# Altium PCB PCB_PL.PcbDoc
Units mm, origin at the board's own origin, x right, y up, seen from the top; angles counter-clockwise.
Board outline 66.68 x 55.88 mm, 2 copper layers (Top Layer, Bottom Layer); 33 components, 14 nets, 82 pads, 0 vias.
Unrouted connection lines stored in the file: 1.
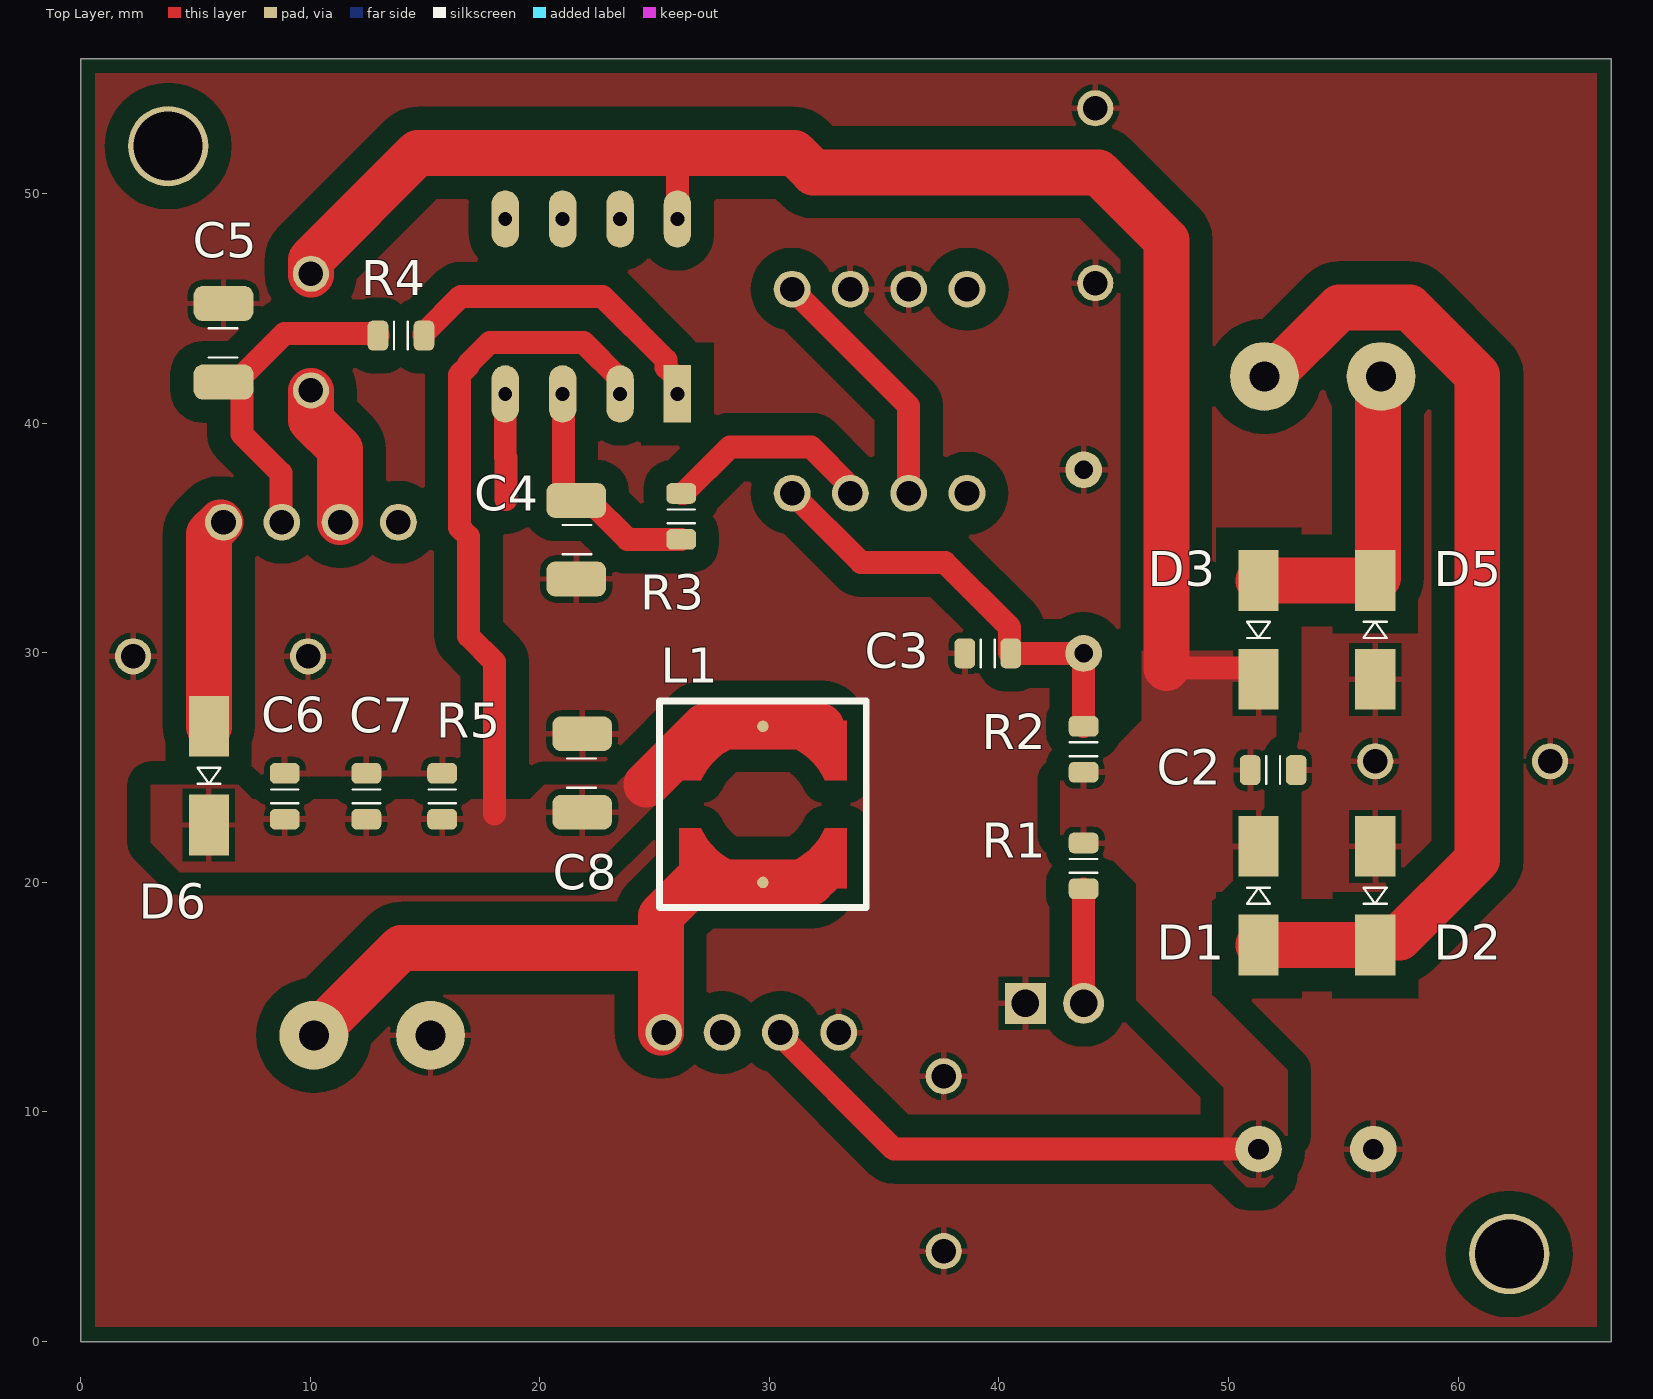
[diagram p0: Top Layer view]
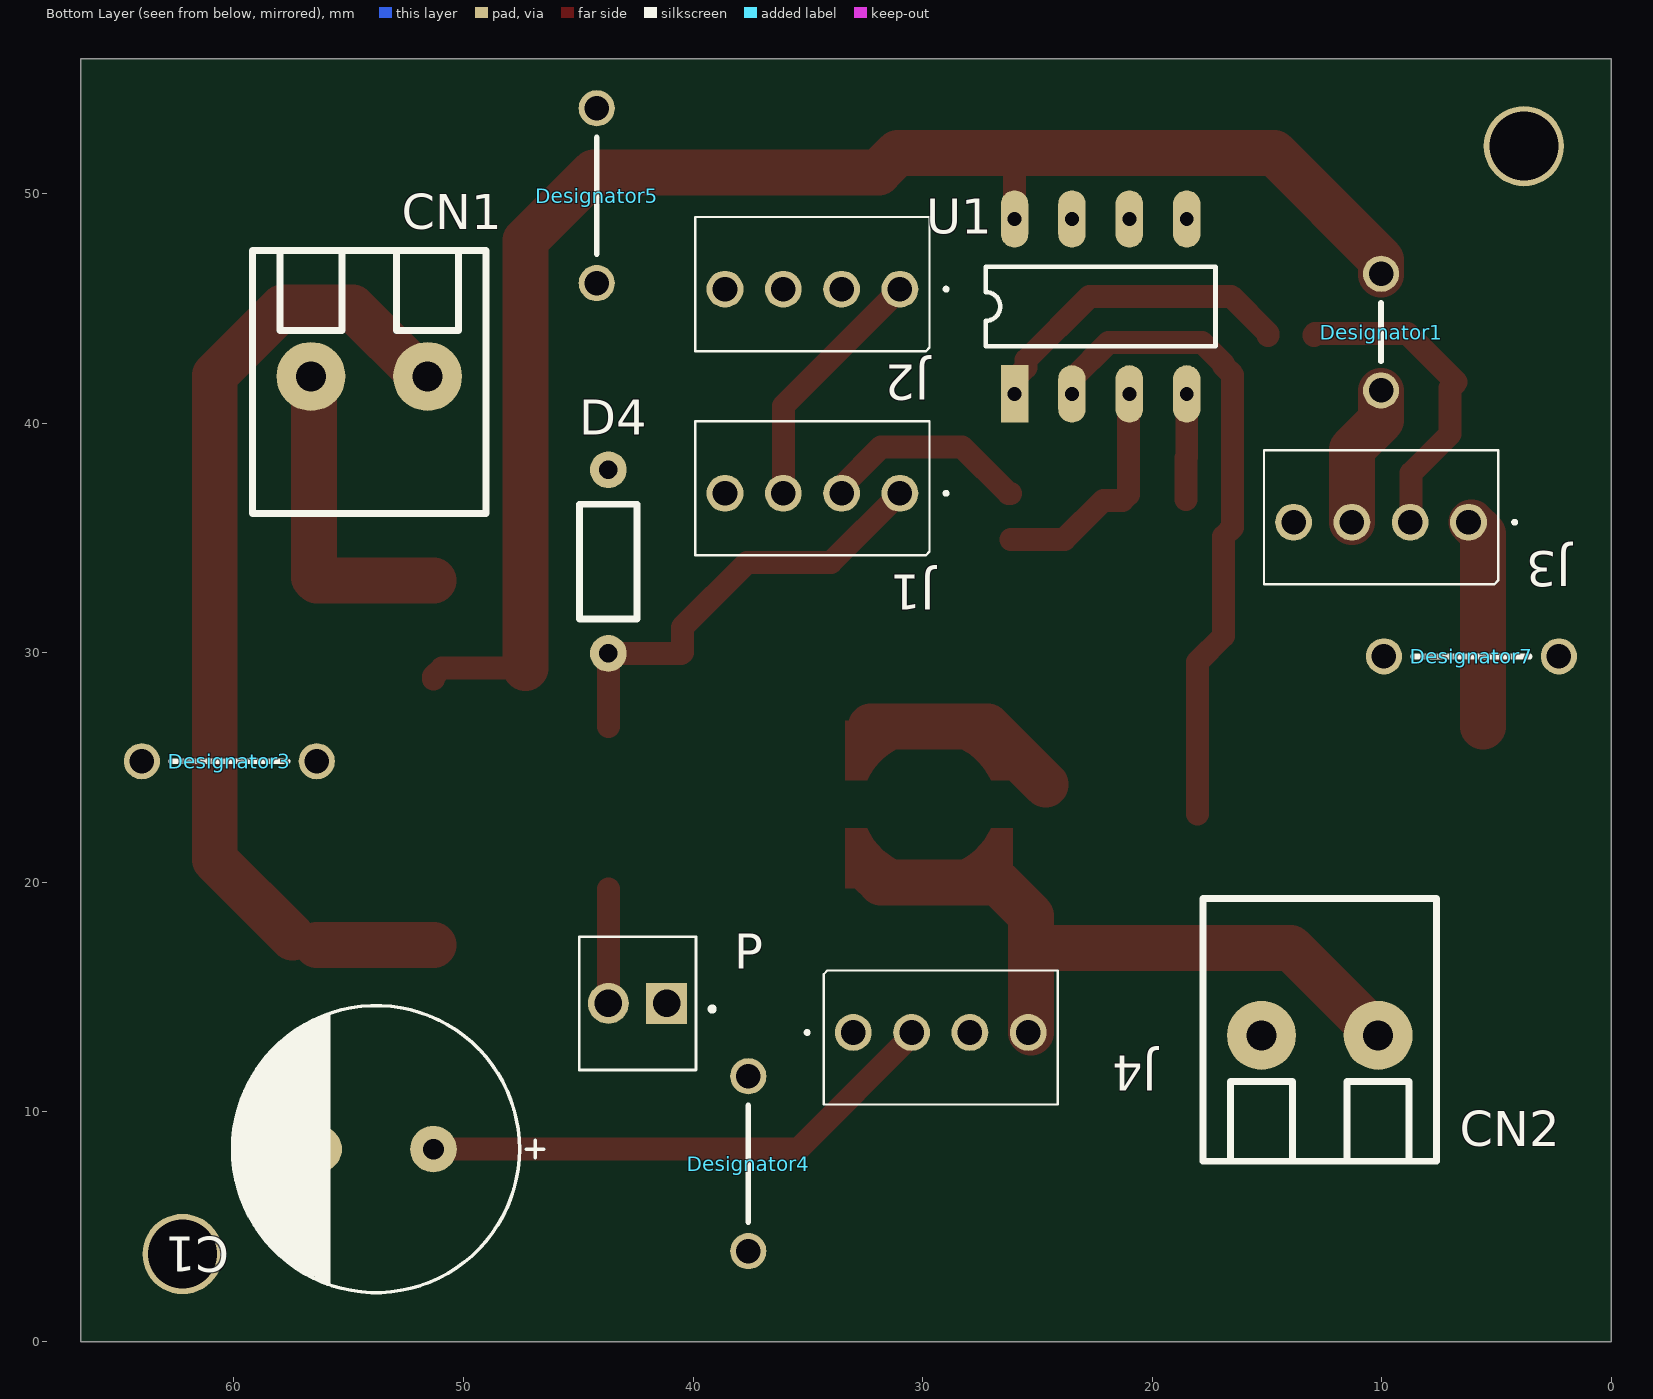
[diagram p1: Bottom Layer view, seen from below]

## Layer stack, top to bottom
Top Solder: solder mask 0.0102, Solder Resist, Dk 3.5
Top Layer: signal copper 0.0356
Dielectric 1: dielectric 0.32, FR-4, Dk 4.8
Bottom Layer: signal copper 0.0356
Bottom Solder: solder mask 0.0102, Solder Resist, Dk 3.5

## Board outline
0,0 0,55.88 66.675,55.88 66.675,0

## Design rules (kind name [scope] priority, off if disabled: settings)
Clearance [All] p1: gap=1 ignorepadtopadclearanceinfootprint=FALSE except(0: Arc-Hole Track-Hole SMDPad-Hole THPad-Hole Via-Hole Fill-Hole Poly-Hole Region-Hole Text-Hole; 0.5: Arc-THPad Track-THPad SMDPad-THPad THPad-THPad)
PolygonConnect [All] p1: connectstyle=Relief reliefconductorwidth=0.254 reliefentries=4 polygonreliefangle="90 Angle" airgapwidth=0.254
RoutingVias [All] p1: holewidth=0.711 width=1.27 viastyle="Through Hole" minholewidth=0.711 minwidth=1.27 maxholewidth=0.711 maxwidth=1.27
SolderMaskExpansion [All] p1: expansion=0.102
Width [All] p1: maxlimit=2 minlimit=1 preferedwidth=1 minimp=50.000000 maximp=50.000000 favimp=50.000000
30 further rules are at their usual default settings.

## Classes and differential pairs
component class SCH: C1 C2 C3 C4 C5 C6 C7 C8 CN1 CN2 D1 D2 D3 D4 D5 D6 J1 J2 J3 J4 L1 P R1 R2 R3 R4 R5

## Components (designator, comment, footprint, x,y, rotation, side; value= is the part's Value field where it differs from the comment)
C1 "Cap Pol" CAP-POL-D12.5-P5.0 53.808,8.382 r180 bottom value="1000 uF"
C2 "Cap" SMD0805 51.943,24.892 r0 top value=100nF
C3 "Cap" SMD0805 39.513,29.972 r180 top value=100nF
C4 "Cap" SMD1210 21.59,34.925 r90 top value=10nF
C5 "Cap" SMD1210 6.223,43.502 r270 top value=10nF
C6 "Cap" SMD0805 8.89,23.749 r90 top value=10uF
C7 "Cap" SMD0805 12.446,23.749 r90 top value=100nF
C8 "Cap" SMD1210 21.844,24.765 r270 top value=10nF
CN1 "Trafo" "BORNE 2Vias" 56.642,42.037 r180 bottom value=AKZ700-2
CN2 "OUTPUT" "BORNE 2Vias" 10.16,13.335 r0 bottom value=AKZ700-2
D1 "Diodo M7" DIODE_DO-214AC 51.308,19.422 r270 top value=M7
D2 "Diodo M7" DIODE_DO-214AC 56.388,19.422 r90 top value=M7
D3 "Diodo M7" DIODE_DO-214AC 51.308,30.997 r90 top value=M7
D4 "24 V" "Resistor 1/4W" 43.688,37.972 r270 bottom
D5 "Diodo M7" DIODE_DO-214AC 56.388,30.997 r270 top value=M7
D6 "Diodo M7" DIODE_DO-214AC 5.588,24.647 r90 top value=M7
Designator1 "Comment" JUMPER_200MIL 10.033,41.427 r90 bottom
Designator3 "Comment" JUMPER_300MILS 56.388,25.273 r0 bottom
Designator4 "Comment" JUMPER_300MILS 37.592,11.557 r270 bottom
Designator5 "Comment" JUMPER_300MILS 44.196,46.101 r90 bottom
Designator7 "Comment" JUMPER_300MILS 9.906,29.845 r180 bottom
J1 "Course" 470533000 30.988,36.948 r180 bottom
J2 "Fine" 470533000 30.988,45.838 r180 bottom
J3 "SeriesPassTrans" 470533000 6.223,35.687 r180 bottom
J4 "Voltmeter" 470533000 33.02,13.462 r0 bottom
L1 "Inductor Iron" WURTH_6823 29.718,23.397 r270 top value=10uH
P "LED" MOLEX_0022272021 42.418,14.732 r180 bottom
R1 "Res1" Resistor0805 43.688,20.717 r270 top value=20K
R2 "Res1" Resistor0805 43.688,25.797 r90 top value=2K2
R3 "Res1" Resistor0805 26.162,35.941 r270 top value=10K
R4 "Res1" Resistor0805 13.954,43.815 r180 top value=10K
R5 "Res1" Resistor0805 15.748,23.749 r90 top value=10K
U1 "LM358" DIP8 25.995,41.275 r90 bottom

## Footprints (in the part's own frame and the unit in brackets; to place one, negate y for a bottom-side part, rotate by r counter-clockwise, add the part's x,y. Pads: shape width x height; smd on the part's side, far side on the other; paste and mask are expansions set on the pad)
470533000 [mm]
  round 1.605 hole 1.07: 1(0,0) 2(-2.54,0) 3(-5.08,0) 4(-7.62,0)
  silkscreen extent -8.91,-2.7 2.06,3.14
"BORNE 2Vias" [mm] "Conector bloco 2 vias 5.08mm"
  round 3 hole 1.3: 1(0,0) 2(5.08,0)
  silkscreen extent -2.54,-5.97 7.62,5.48, body extent -2.54,-5.97 7.62,5.47, height 19
CAP-POL-D12.5-P5.0 [mm] "Capacitor eletrolitico Diametro 10mm, Pitch 5mm"
  round 2.032 hole 0.9: 1(2.5,0) 2(-2.5,0)
  silkscreen extent -6.25,-6.25 7.31,6.25, body extent -5.04,-5.01 5.02,5.04, height 13.03
DIODE_DO-214AC [mm] "Diode SMA"
  rect 2.65x1.75 smd: A(2.15,0) K(-2.15,0)
  Mechanical 1 keep-out region: -3.75,-1.7 3.75,-1.7 3.75,1.7 -3.75,1.7
  silkscreen extent -0.35,-0.5 0.35,0.5, body extent -2.64,-1.47 2.64,1.45, height 2.41
DIP8 [mm]
  rect 2.5x1.2 hole 0.6: 1(0,0)
  oval 2.5x1.2 hole 0.6: 2(0,-2.5) 3(0,-5) 4(0,-7.5) 5(7.62,-7.5) 6(7.62,-5) 7(7.62,-2.5) 8(7.62,0)
  silkscreen extent 2.08,-8.75 5.54,1.25
JUMPER_200MIL [mil] "Jumper 200 mils"
  round 62 hole 42: 1(0,0) 2(200,0)
  silkscreen extent 50,0 150,0
JUMPER_300MILS [mil] "Jumper de 300 mils"
  round 62 hole 42: 1(0,0) 2(300,0)
  silkscreen extent 50,0 250,0
MOLEX_0022272021 [mm]
  rect 1.785x1.785 hole 1.19: 1(1.27,0)
  round 1.785 hole 1.19: 2(-1.27,0)
  silkscreen extent -2.54,-2.9 3.35,2.9
Resistor0805 [mm] "Resistor 0805 in"
  rrect50% 0.9x1.3 smd: 1(1,0) 2(-1,0)
  Mechanical 1 keep-out region: 2,1 -2,1 -2,-1 2,-1
  silkscreen extent -0.3,-0.6 0.3,0.6, body extent -1,-0.6 1,0.6, height 0.45
"Resistor 1/4W" [mm]
  round 1.6 hole 0.8: 1(0,0) 2(8,0)
  silkscreen extent 1.5,-1.25 6.5,1.25, body extent -0.25,-1.1 8.25,1.1, height 2.39
SMD0805 [mm] "Encapsulamento SMD 0805"
  rrect50% 0.9x1.3 smd: 1(1,0) 2(-1,0)
  Mechanical 1 keep-out region: 2,1 -2,1 -2,-1 2,-1
  silkscreen extent -0.3,-0.6 0.3,0.6, body extent -1,-0.6 1,0.6, height 0.45
SMD1210 [mm] "Capacitor cerâmico SMD 1210"
  rrect50% 1.52x2.6 smd: 1(-1.71,0) 2(1.71,0)
  Mechanical 1 keep-out region: -2.95,-1.6 2.95,-1.6 2.95,1.6 -2.95,1.6
  silkscreen extent -0.63,-0.65 0.64,0.6, body extent -1.58,-1.27 1.62,1.28, height 2.5
WURTH_6823 [mm] "Inductor WURTH 6823"
  round 0.5 smd paste-1 mask-1: 1(-3.4,0) 2(3.4,0)
  Top Layer region: 3.65,3.65 1.05,3.65 1.05,2.7 2.106,1.875 2.694,0.67 2.694,-0.67 2.106,-1.875 1.05,-2.7 1.05,-2.7 1.05,-3.65 3.65,-3.65
  Top Layer region: -3.65,-3.65 -1.05,-3.65 -1.05,-2.7 -2.106,-1.875 -2.694,-0.67 -2.694,0.67 -2.106,1.875 -1.05,2.7 -1.05,2.7 -1.05,3.65 -3.65,3.65
  silkscreen extent -4.5,-4.5 4.5,4.5, body extent -3.4,-3.4 3.4,3.4, height 2.3

## Part data
C1: "Capacitor eletrolítico"
C2 C3 C4 C5 C6 C7 C8: "Capacitor", LatestRevisionDate=17-Jul-2002, LatestRevisionNote="Re-released for DXP Platform.", PackageDescription="Radial Cap, Thru-Hole; 2 Leads; 0.3 in Pin Spacing", PackageReference=RAD-0.3, Published=8-Jun-2000, Publisher="Altium Limited"
CN1 CN2: library part BORNE-2, "Borne 2 vias", PartNum=AKZ700-2
D1 D2 D3 D5 D6: "1 Amp General Purpose Rectifier", Code_JEDEC=DO-204-AL, ComponentLink1Description="Manufacturer Link", ComponentLink1URL=http://www.fairchildsemi.com/, ComponentLink2Description=Datasheet, ComponentLink2URL=http://www.fairchildsemi.com/ds/1N%2F1N4001.pdf, DatasheetVersion=1998, LatestRevisionDate=17-Jul-2002, LatestRevisionNote="Re-released for DXP Platform.", PackageDescription="Diode, Axial; Body 5.2 x 2.7 mm (LxDia. max), Lead Dia. 0.86 mm (max)", PackageReference=DO-41, PackageVersion=Aug-1999, Published=8-Jun-2000, Publisher="Altium Limited"
D4: library part "Diodo zener TVS", "Zener Diode", LatestRevisionDate=17-Jul-2002, LatestRevisionNote="Re-released for DXP Platform.", PackageDescription="Diode, Thru-Hole; 2 Leads; 0.7 in Pin Spacing", PackageReference=DIODE-0.7, Published=8-Jun-2000, Publisher="Altium Limited"
J1 J2 J3 J4: library part 47053-3000, "KK® 254 Vertical Header, with Friction Lock, 4 Circuits, PC Tail Length: 4.00mm", Package=None, Availability=Warning, Check_prices=https://www.snapeda.com/parts/47053-3000/Molex/view-part/623783/?ref=eda, MF=Molex, MP=47053-3000, Price=None, Purchase-URL=https://pricing.snapeda.com/search/part/47053-3000/?ref=eda, SnapEDA_Link=https://www.snapeda.com/parts/47053-3000/Molex/view-part/623783/?ref=snap
L1: "Magnetic-Core Inductor", LatestRevisionDate=17-Jul-2002, LatestRevisionNote="Re-released for DXP Platform.", PackageDescription="Axial Device, Thru-Hole; 2 Leads; 0.9 in Pin Spacing", PackageReference=AXIAL-0.9, Published=24-Mar-1999, Publisher="Altium Limited"
P: library part 0022272021, "Connector Header Through Hole 2 position 0.100 _2.54mm_", Package=None, Availability=Unavailable, MF=Molex, MP=0022272021, Price=None, SnapEDA_Link=https://www.snapeda.com/parts/0022272021/Molex/view-part/424357/?ref=snap
R1 R2 R3 R4 R5: "Resistor", LatestRevisionDate=17-Jul-2002, LatestRevisionNote="Re-released for DXP Platform.", PackageDescription="Axial Device, Thru-Hole; 2 Leads; 0.3 in Pin Spacing", PackageReference=AXIAL-0.3, Published=8-Jun-2000, Publisher="Altium Limited"

## Free pads (board coordinates)
  round 3.5 hole 3: 1(62.23,3.81) 2(3.81,52.07)

## Nets (pads, with @x,y where several pads share a name; then routed paths per layer and width w, separated by ;. In a path a pad name is that pad's centre, name@x,y a point inside that pad or via, vN(x,y) a via of type N, cw(c..) or ccw(c..) an arc to the next point about the centre after c; other vN are vias at no path point)
24Vz: C3.2 D4.2 J1.1 R2.1 | length 19.4
  Top Layer w1: J1.1@30.988,36.957 J1.1 30.988,36.939 33.994,33.933 37.641,33.933 40.463,31.112 40.463,30.022 C3.2 D4.2 R2.1
"32 V": C1.1 C2.2 D1.K D3.K Designator1.1 Designator1.2 J3.3 J4.2 R1.2 R2.2 U1.8 | length 96.5
  Top Layer w1: U1.8 25.995,51.732 26.035,51.772 ; J4.2@30.353,13.462 30.353,13.453 35.424,8.382 C1.1 ; 47.289,29.337 50.933,29.337 51.308,28.962 D3.K
  Top Layer w2: Designator1.1@10.033,41.402 10.033,40.132 11.303,38.862 J3.3 ; Designator1.2@10.033,46.482 10.033,47.117 14.688,51.772 26.035,51.772 31.083,51.772 31.928,50.927 44.323,50.927 47.289,47.961 47.289,29.337
GND: C1.2 C2.1 C3.1 C4.1 C5.1 C6.1 C7.1 C8.1 CN2.2 D2.A D4.1 D5.A Designator3.1 Designator3.2 Designator4.1 Designator4.2 Designator5.1 Designator5.2 Designator7.1 Designator7.2 J2.2 J2.3 J4.1 P.1 R5.1 U1.4 | length 4.6
  Top Layer w1: U1.4 18.495,38.525 18.535,38.485 18.535,36.677
NetC4_2: C4.2 R3.1 U1.3 | length 10.3
  Top Layer w1: U1.3 21.033,41.237 21.033,36.895 21.293,36.635 C4.2 22.13,36.635 23.824,34.941 R3.1
NetCN1_1: CN1.1 D3.A D5.K | length 14.1
  Top Layer w2: D3.A D5.K 56.513,33.272 56.513,41.908 CN1.1
NetCN1_2: CN1.2 D1.A D2.K | length 42.7
  Top Layer w2: D1.A D2.K ; CN1.2 51.833,42.037 54.833,45.037 57.885,45.037 60.833,42.089 60.833,20.989 57.441,17.597
NetCN2_1: CN2.1 J4.4 L1.2 | length 29.5
  Top Layer w2: CN2.1 13.97,17.145 25.273,17.145 ; J4.4@25.273,13.462 25.273,17.145 ; 32.258,20.447 31.808,19.997 L1.2 26.728,19.997 25.273,18.542 25.273,17.145
NetD6_1: D6.A J3.1 | length 9.1
  Top Layer w2: D6.A 5.588,35.179 J3.1@6.096,35.687
NetJ1_2: J1.2 R3.2 | length 9.1
  Top Layer w1: R3.2 26.262,36.941 28.278,38.957 31.816,38.957 33.528,37.246 33.528,37.236 J1.2@33.668,37.097
NetJ1_3: J1.3 J2.1 | length 11
  Top Layer w1: J2.1@30.988,45.847 J2.1 30.988,45.829 36.059,40.758 36.068,40.758 J1.3@36.068,36.957
NetP_2: P.2 R1.1 | length 5
  Top Layer w1: P.2 R1.1
NetR4_2: R4.2 U1.1 | length 14.1
  Top Layer w1: R4.2 14.954,43.915 16.564,45.525 22.723,45.525 25.495,42.753 25.495,42.425 25.995,41.925 U1.1
OPAMP_FDBCK: C6.2 C7.2 C8.2 D6.K L1.1 R5.2 U1.2 | length 38
  Top Layer w1: 18.034,22.987 18.034,29.591 16.895,30.73 16.895,35.064 16.495,35.464 16.495,42.103 16.895,42.503 16.895,42.588 17.832,43.525 21.895,43.525 23.495,41.925 U1.2 U1.2@23.495,40.625
  Top Layer w2: 24.638,24.257 27.178,26.797 L1.1 32.258,26.797
OPAMP_OUT: C5.2 J3.2 R4.1 | length 14.1
  Top Layer w1: J3.2 8.723,35.727 8.723,37.832 7.023,39.532 7.023,41.532 6.763,41.792 8.873,43.902 12.904,43.902 12.954,43.852 R4.1
pads on no net: J1.4 J2.4 J3.4 J4.3 U1.5 U1.6 U1.7

## Polygon pours and split planes (outlines as drawn)
GND on Top Layer "Top Layer-GND" (solid, pour order 24): 0.635,55.245 66.04,55.245 66.04,0.635 0.635,0.635
"32 V" on Top Layer "Top Layer-32 V" (solid, pour order 20): 50.8,6.731 49.784,7.747 49.784,11.049 45.974,14.859 45.974,19.939 44.958,20.955 42.926,20.955 42.672,21.209 42.672,25.273 43.18,25.781 44.958,25.781 46.228,27.051 46.228,30.099 49.784,30.099 52.07,30.099 52.07,26.289 51.562,25.781 51.562,23.495 51.562,20.447 50.546,20.447 49.276,19.177 49.276,15.113 52.578,11.811 52.578,7.747 51.562,6.731
OPAMP_FDBCK on Top Layer "Top Layer-OPAMP_FDBCK" (solid, pour order 12): 6.858,24.257 7.493,23.622 19.558,23.622 20.193,24.257 23.368,24.257 23.368,24.347 25.273,26.162 25.273,25.527 25.273,23.622 22.098,20.447 4.318,20.447 3.048,21.717 3.048,24.257
OPAMP_FDBCK on Top Layer "Top Layer-OPAMP_FDBCK 1" (solid, pour order 14): 33.02,32.385
OPAMP_FDBCK on Top Layer "Top Layer-OPAMP_FDBCK 2" (solid, pour order 6): 24.13,26.67

## Silkscreen, mask and mechanical layers (free items; w line width, h text height)
Mechanical 13:
  the board outline again, w0.254